# EAGLE board Motor Module V1-side mounting (EAGLE 6.6.0)

Size 30 x 45 mm. Coordinates in mm from the lower left corner, seen from the top.
Outline: 0,0 30,0 30,29 21,29 21,34 30,34 30,45 0,45 0,34 9,34 9,29 0,29 0,0
Copper layers (1*16): Top 0.035mm / dielectric 1.5mm / Bottom 0.035mm
Design rules "default": minimum track width 10mil, minimum drill 24mil, track to track 8mil, track to pad 8mil, pad to pad 8mil, via to via 8mil, smd to smd 8mil, copper to edge 40mil, drill to drill 8mil, minimum pad ring 10mil, minimum via ring 8mil, stop-mask expansion 4mil, vias tented up to drill 0mil, thermal gap 10mil

## Footprints (pad centres in the part's own frame; a part is rotated, then mirrored left to right if it is on the bottom)
1,6/0,8 = drill 0.813 pad 1.6 octagon: 1 0,0
EIA3216 = smd 1.4 x 1.6: A 1.4,0; C -1.4,0
0603-CAP = smd 1.1 x 1: 1 -0.85,0; 2 0.85,0
SOD523 = smd 0.7 x 0.5: A 0.7,0; C -0.6,0
LED-1206-BOTTOM = smd 1.5 x 1.6: A -1.8,0; C 1.8,0 | hole 2.3: 0,0
FIDUCIAL-1X2 = smd 1 x 1: 1 0,0
SOT223 = smd 1.219 x 2.235: 1 -2.311,-3.099; 2 0,-3.099; 3 2.311,-3.099 | smd 3.6 x 2.2: 4 0,3.099
RFD22301 = smd 3.353 x 0.813: 1 0,0; 2 0,-1.27; 3 0,-2.54; 4 0,-3.81; 5 0,-5.08; 6 0,-6.35; 7 0,-7.62; 8 0,-8.89; 9 13.411,-12.675; 10 13.411,-11.405; 11 13.411,-10.135; 12 13.411,-8.865; 13 13.411,-7.595; 14 13.411,-6.325; 15 13.411,-5.055; 16 13.411,-3.785; 17 13.411,-2.515; 18 13.411,-1.245; 19 13.411,0.025
SSOP20_L = smd 0.381 x 1.143: 1 -2.857,-2.68; 2 -2.223,-2.68; 3 -1.587,-2.68; 4 -0.953,-2.68; 5 -0.318,-2.68; 6 0.318,-2.68; 7 0.953,-2.68; 8 1.587,-2.68; 9 2.223,-2.68; 10 2.857,-2.68; 11 2.857,2.68; 12 2.223,2.68; 13 1.587,2.68; 14 0.953,2.68; 15 0.318,2.68; 16 -0.318,2.68; 17 -0.953,2.68; 18 -1.587,2.68; 19 -2.223,2.68; 20 -2.857,2.68
USB-B-MICRO-SMD_V03 = smd 1.45 x 0.4: D+1 2.725,0; D-1 2.725,0.65; GND1 2.725,-1.3; ID1 2.725,-0.65; VBUS1 2.725,1.3 | smd 1.5 x 1.8: SHIELD1 0,3.685; SHIELD2 0,-3.685 | smd 1.5 x 2.5: SHIELD3 0,0 | hole 0.85: 2.2,1.9; 2.2,-1.9
JP1 = drill 0.914 long: 1 0,-1.27; 2 0,1.27
LED-TRICOLOR-5050 = smd 2 x 1.1: 1 -2.4,1.7; 2 -2.4,0; 3 -2.4,-1.7; 4 2.4,-1.7; 5 2.4,0; 6 2.4,1.7
R0603 = smd 1 x 1.1: 1 -0.85,0; 2 0.85,0
R0402 = smd 0.7 x 0.9: 1 -0.65,0; 2 0.65,0
0603-ARV = smd 0.5 x 0.65: 1 -1.2,-0.625; 2 -0.4,-0.625; 3 0.4,-0.625; 4 1.2,-0.625; 5 1.2,0.625; 6 0.4,0.625; 7 -0.4,0.625; 8 -1.2,0.625

## Placement (x,y rotation side)
BAT-NEG  [1,6/0,8]  6,43 0 top
BAT-POS  [1,6/0,8]  2,43 0 top
C1  10uF  [EIA3216]  14,29 180 top
C2  10uF  [EIA3216]  25,40 90 top
C3  10uF  [EIA3216]  4,4 90 top
C4  0.1uF  [0603-CAP]  22,40 90 top
C5  0.1uF  [0603-CAP]  17.34,25.05 270 top
C6  0.1uF  [0603-CAP]  10.63,21.59 180 top
C7  0.1uF  [0603-CAP]  8,40 270 top
C8  0.1uF  [0603-CAP]  6,25 90 top
C9  10uF  [EIA3216]  -5,37 0 top  (outside the outline)
C10  0.1uF  [0603-CAP]  -5,46 0 top  (outside the outline)
C11  2.2uF  [0603-CAP]  -5,42 0 top  (outside the outline)
D1  500mA  [SOD523]  7,3 270 top
D2  500mA  [SOD523]  5,36 0 top
D3  PWR  [LED-1206-BOTTOM]  3,25 270 top
D4  Green  [LED-1206-BOTTOM]  -5.4,8.2 90 top  (outside the outline)
D5  500mA  [SOD523]  -5.67,0.64 0 top  (outside the outline)
FID1  FIDUCIAL1X2  [FIDUCIAL-1X2]  10,32 0 top
FID2  FIDUCIAL1X2  [FIDUCIAL-1X2]  13,8 0 top
FID3  FIDUCIAL1X2  [FIDUCIAL-1X2]  28,1 0 top
FID4  FIDUCIAL1X2  [FIDUCIAL-1X2]  1,1 0 top
IC1  LM340S  [SOT223]  14.22,36.71 0 top
IC2  RF22301  [RFD22301]  15.92,6.58 90 top
IC3  FTS31XS-U  [SSOP20_L]  10.6,14.71 90 top
JP1  uUSB Conn  [USB-B-MICRO-SMD_V03]  14,1 90 top
JP2  [JP1]  5.41,14.29 0 top
JP3  [JP1]  -5,18 0 top  (outside the outline)
LED1  LED-TRICOLOR-5050NO_IC  [LED-TRICOLOR-5050]  25,25 0 top
M+  [1,6/0,8]  28,41 90 top
M-  [1,6/0,8]  28,43 90 top
MR  [1,6/0,8]  28,37 90 top
MT  [1,6/0,8]  28,39 90 top
R1  27E  [R0603]  7,6.5 90 top
R2  27E  [R0603]  10,6.5 90 top
R3  27E  [R0603]  -5,25 0 top  (outside the outline)
R4  10k  [R0402]  -5,32 0 top  (outside the outline)
R5  330E  [0603-ARV]  20,25 270 top
SW1-1  [1,6/0,8]  2,36 0 top
SW1-2  [1,6/0,8]  2,39 0 top

## Library data of the parts
BAT-NEG BAT-POS M+ M- MR MT SW1-1 SW1-2 = wirepad
C1-C3 C9 = SparkFun-Capacitors; PROD_ID: CAP-00811
C4-C8 C10 C11 = SparkFun-Capacitors; PROD_ID: CAP-08604
D1 D2 D5 = diode
D3 D4 = SparkFun-LED; PROD_ID: DIO-11076
FID1-FID4 = SparkFun-Aesthetics
IC1 = linear
IC2 = GeekAmmo
IC3 = SparkFun-DigitalIC; PROD_ID: IC-11524
JP1 = SparkFun-Connectors; PROD_ID: CONN-11752
JP2 JP3 = jumper
LED1 = SparkFun-LED
R1-R3 = resistor
R4 = rcl
R5 = SparkFun-Passives

## Nets
+5V: D1.A JP1.VBUS1
+12V: D2.A M+.1 SW1-1.1
BAT-POS: BAT-POS.1 SW1-2.1
GND: BAT-NEG.1 C1.C C2.C C3.C C4.2 C5.2 C6.2 C7.2 D3.C IC1.2 IC1.4 IC2.1 IC2.2 IC2.8 IC2.9 IC2.10 IC2.12 IC2.18 IC2.19 IC3.6 IC3.16 JP1.GND1 JP1.SHIELD1 JP1.SHIELD2 JP1.SHIELD3 M-.1
LBLUE: IC2.6 LED1.4
LGREEN: IC2.5 LED1.6
LRED: IC2.7 LED1.5
N$1: C8.1 IC3.1
N$2: JP1.D-1 R1.2
N$3: LED1.2 R5.1
N$4: JP1.D+1 R2.2
N$5: LED1.1 R5.2
N$6: LED1.3 R5.6
N$7: D3.A R5.4
N$9: JP2.2 MR.1
N$12: D1.C D2.C IC1.1
RST/: C8.2 IC2.14
USB-NEG: IC3.12 R1.1
USB-POS: IC3.11 R2.1
USB-RX: IC2.17 IC3.4 MT.1
USB-TX: IC2.16 IC3.20 JP2.1
VCC: C1.A C2.A C3.A C4.1 C5.1 C6.1 C7.1 IC1.3 IC2.13 IC3.3 IC3.13 IC3.14 IC3.15 R5.3 R5.5 R5.7 R5.8

## Tracks (layer width: path | path; a pad name or v marks a point on that pad's centre or on a via)
+5V  (1 unrouted)
+12V  (2 unrouted)
BAT-POS  (1 unrouted)
GND  (25 unrouted)
LBLUE  (1 unrouted)
LGREEN  (1 unrouted)
LRED  (1 unrouted)
N$1  (1 unrouted)
N$2  (1 unrouted)
N$3  (1 unrouted)
N$4  (1 unrouted)
N$5  (1 unrouted)
N$6  (1 unrouted)
N$7  (1 unrouted)
N$9  (1 unrouted)
N$12  (2 unrouted)
RST/  (1 unrouted)
USB-NEG  (1 unrouted)
USB-POS  (1 unrouted)
USB-RX  (2 unrouted)
USB-TX  (2 unrouted)
VCC  (16 unrouted)

## Text on the board
Measures: Motor Module-1 | All measurements in mm